# Altium PCB Arduino Shield PCB.PcbDoc
Units mil, origin at the board's own origin, x right, y up, seen from the top; angles counter-clockwise.
Board outline 2700 x 2100 mil, 4 copper layers (Component Side, Ground Plane, Power Plane, Solder Side), stack 58.234 mil thick; 21 components, 16 nets, 110 pads, 88 vias.
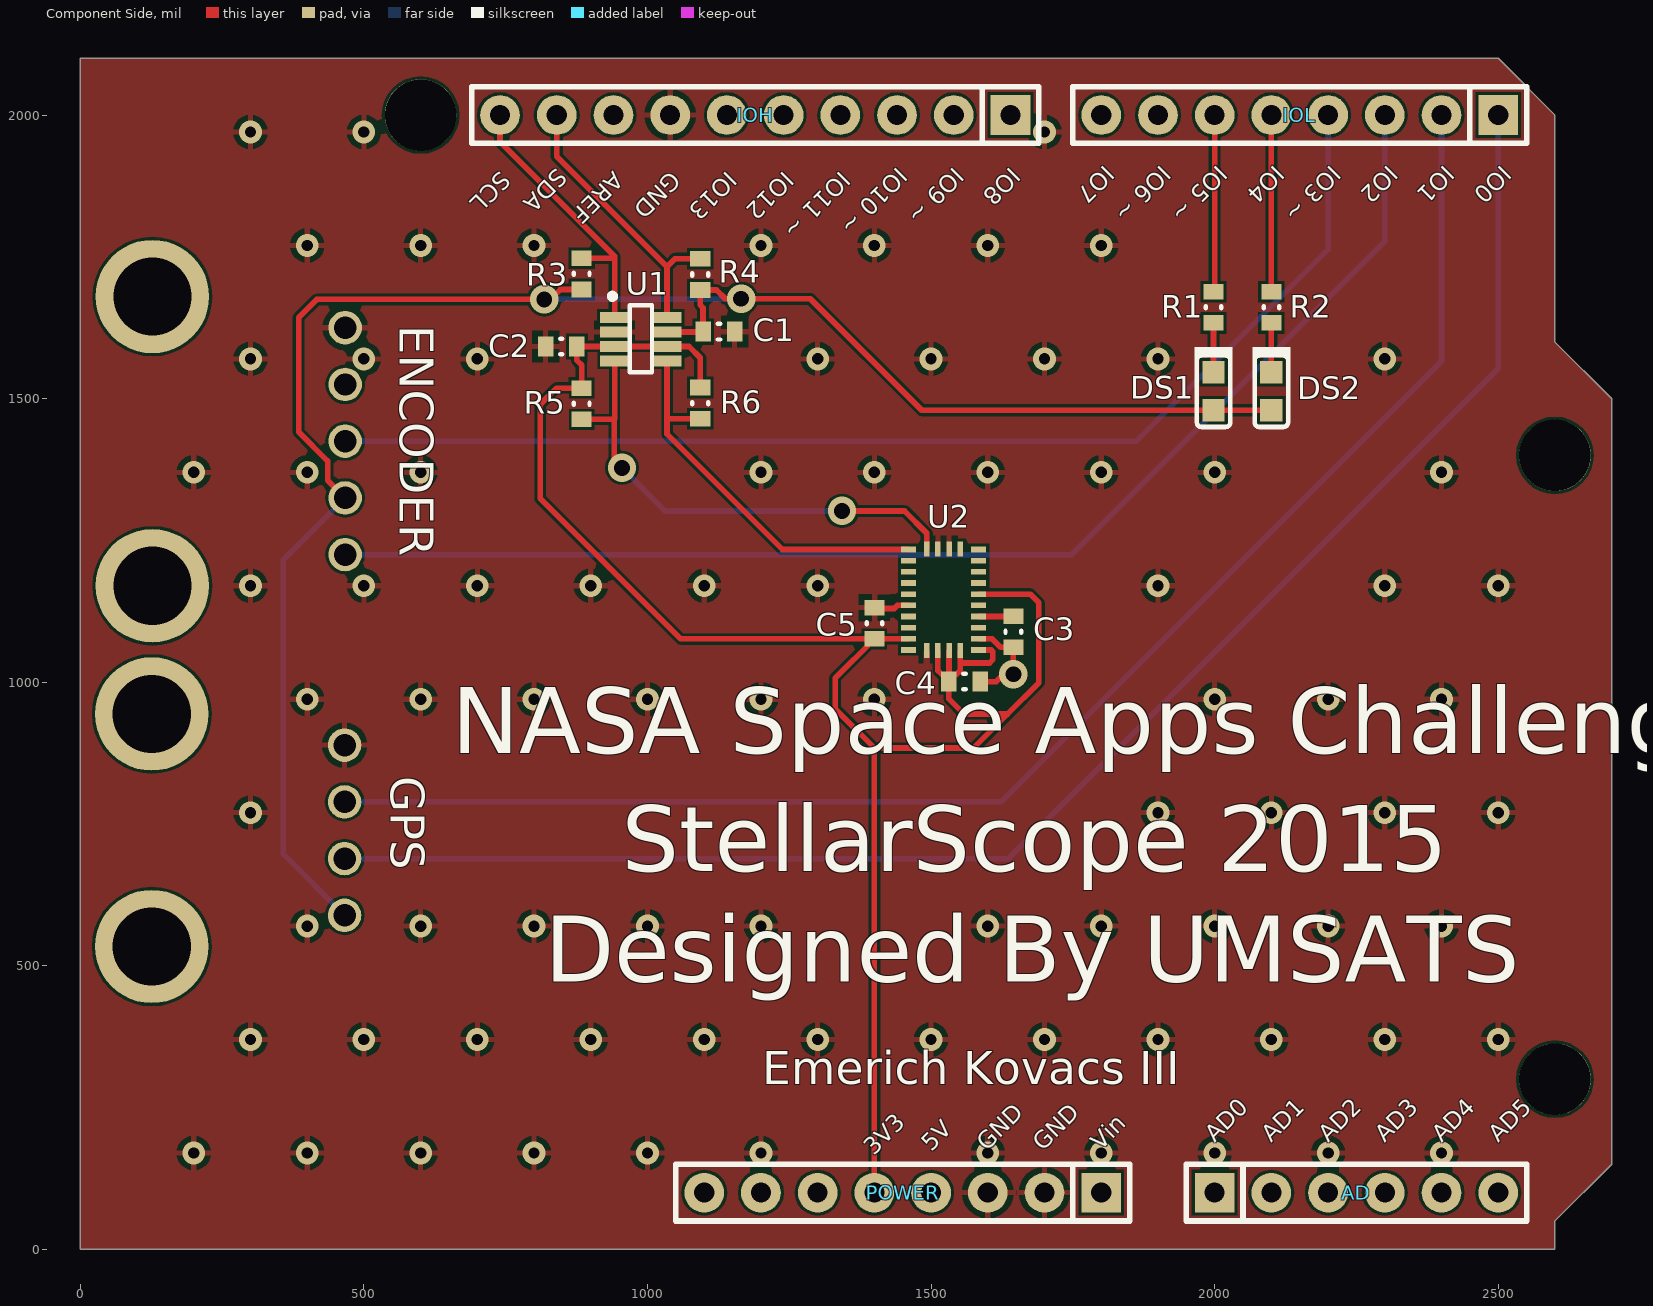
[diagram p0: Component Side view]
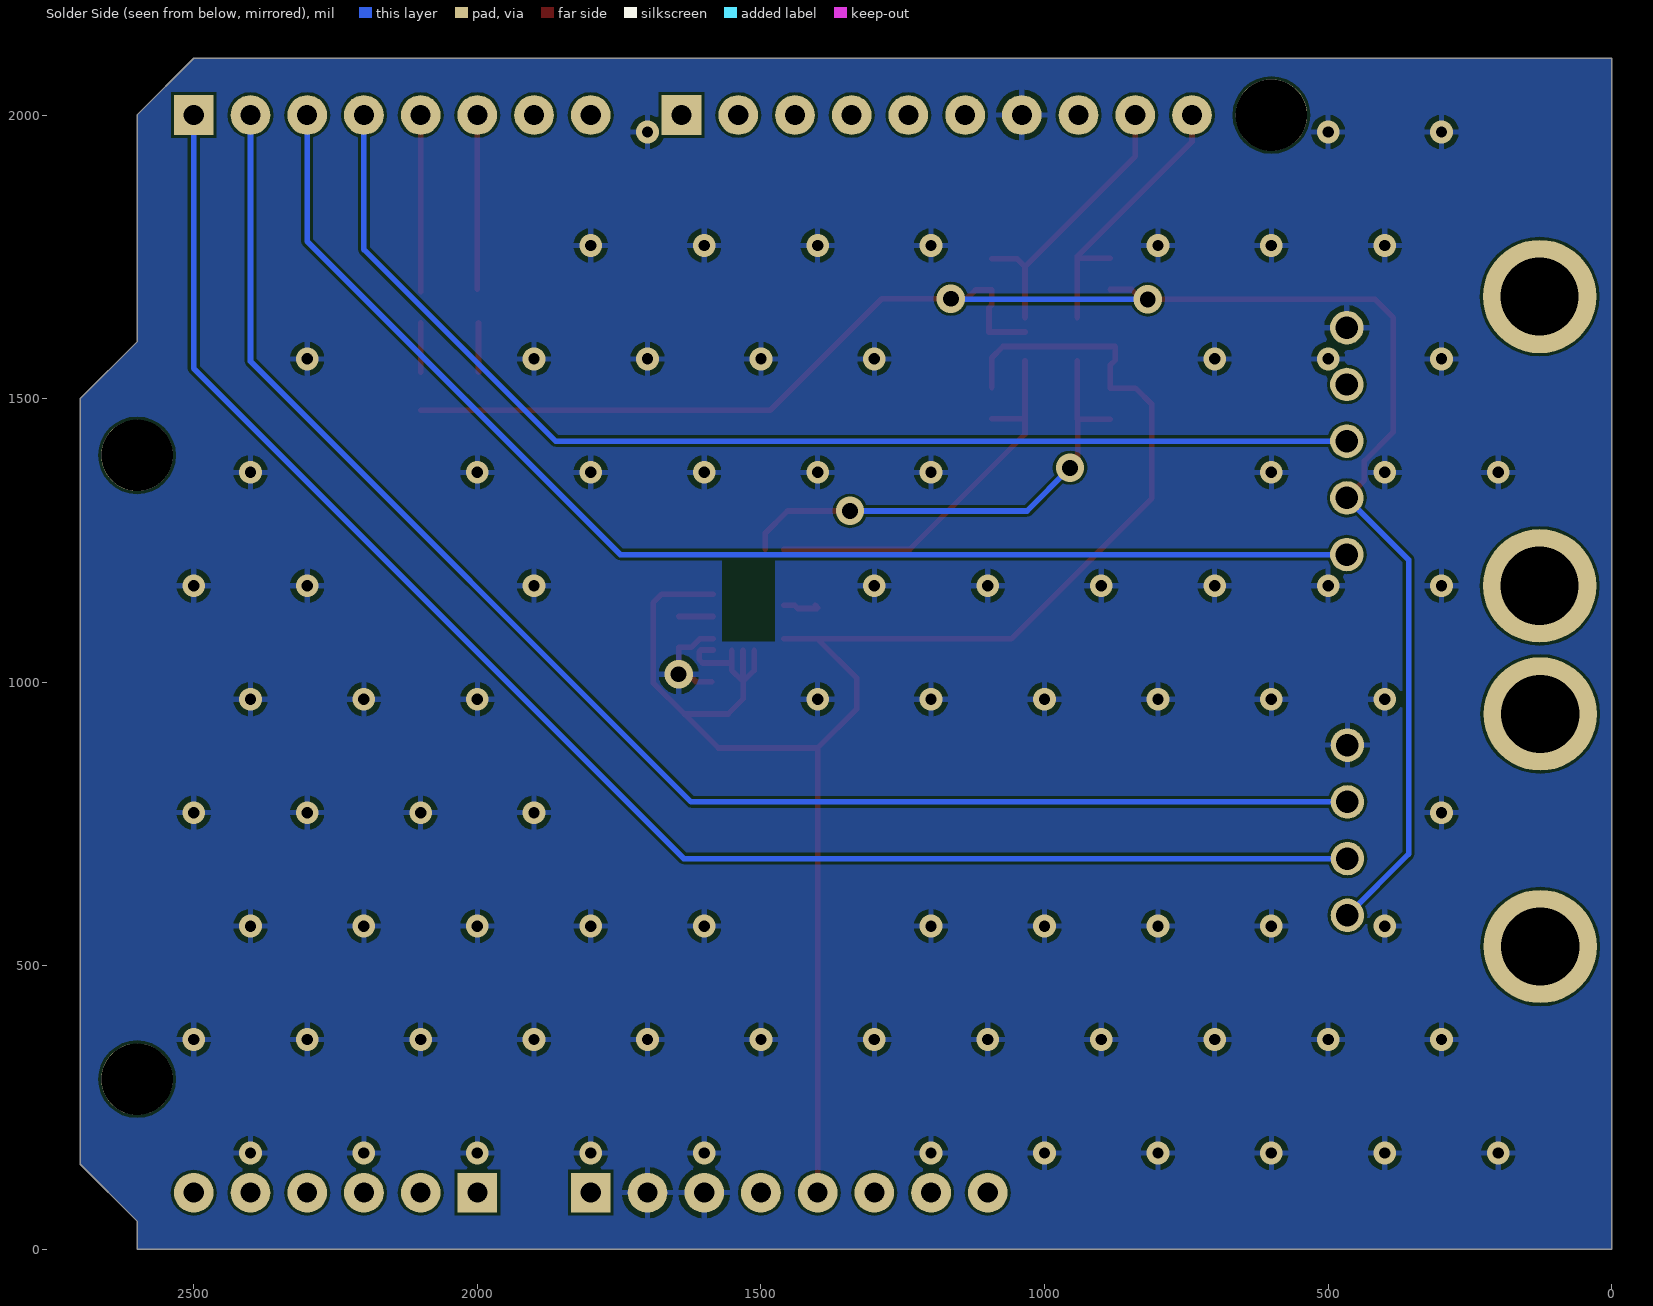
[diagram p1: Solder Side view, seen from below]
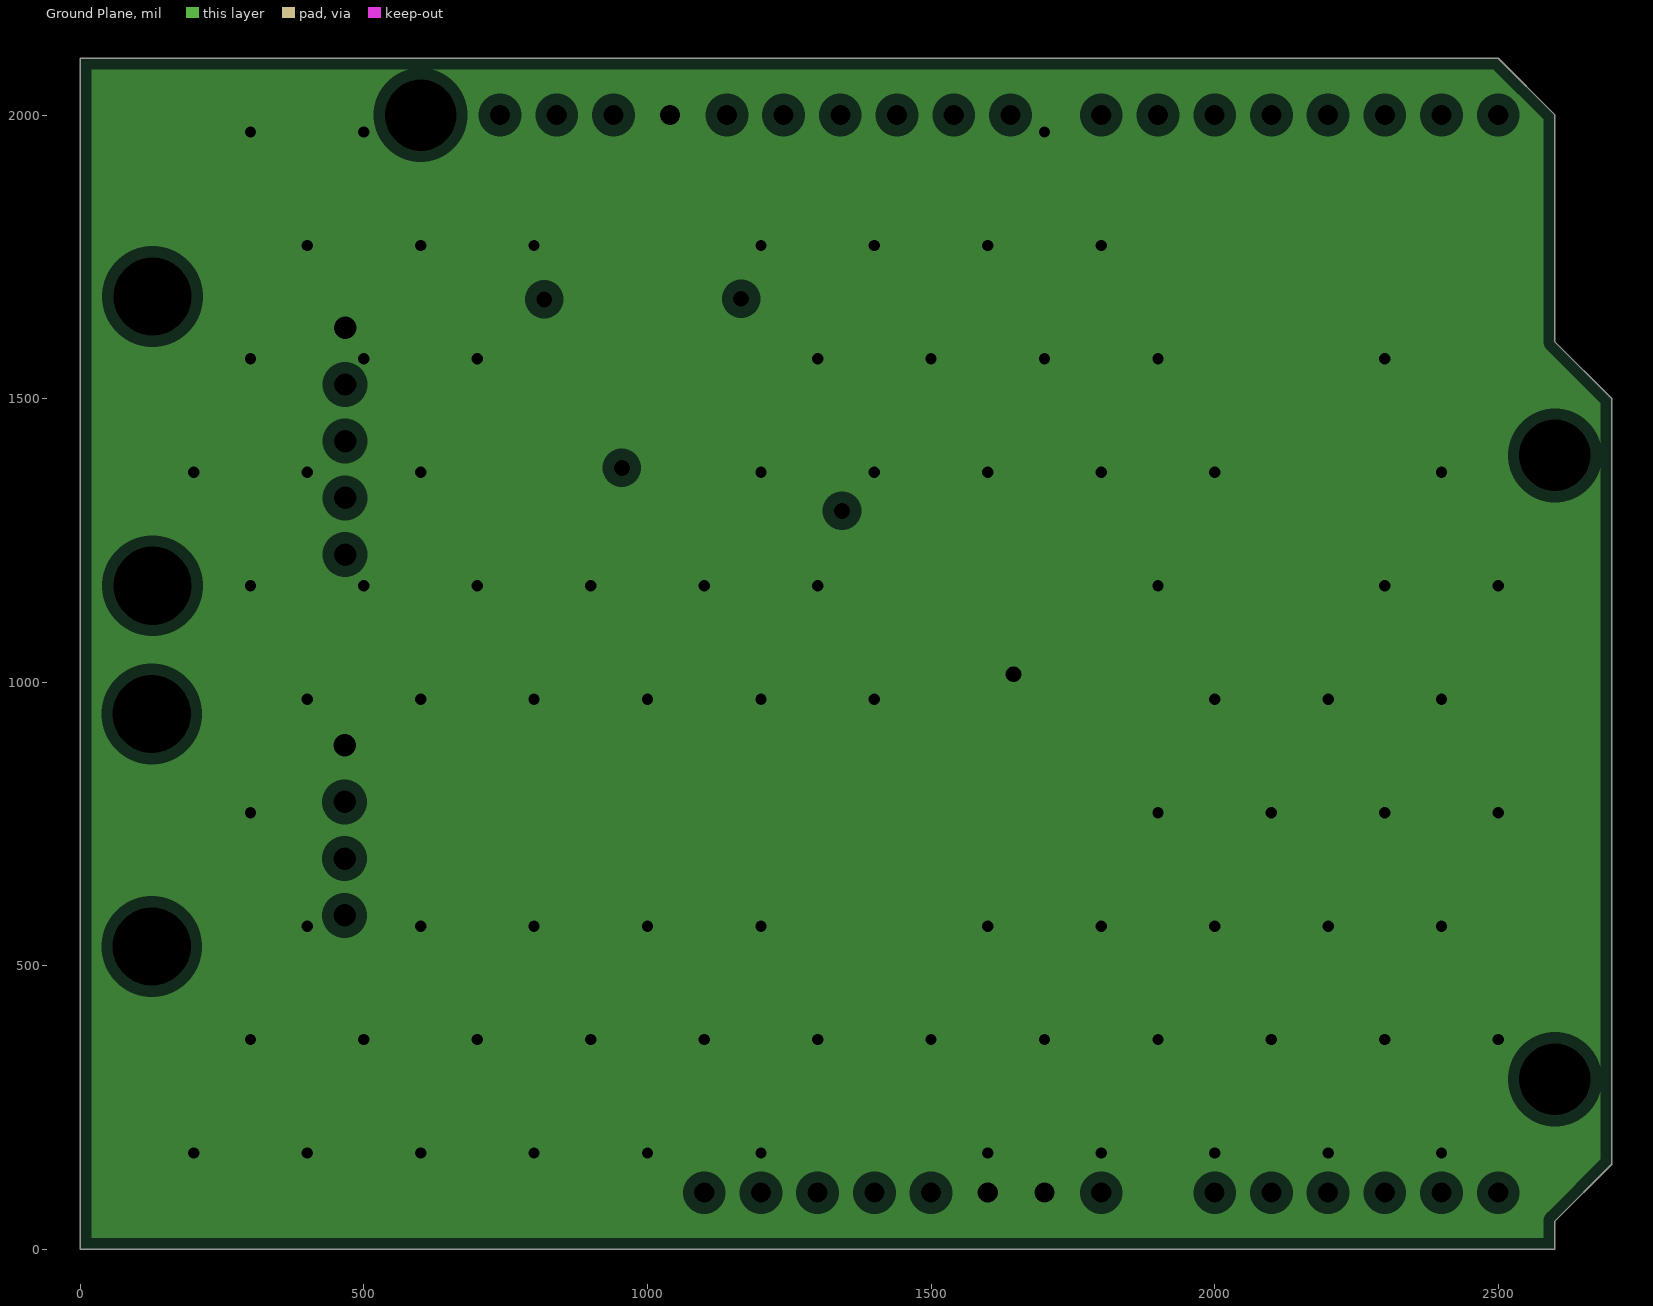
[diagram p2: Ground Plane, clearances drawn from the general rule]
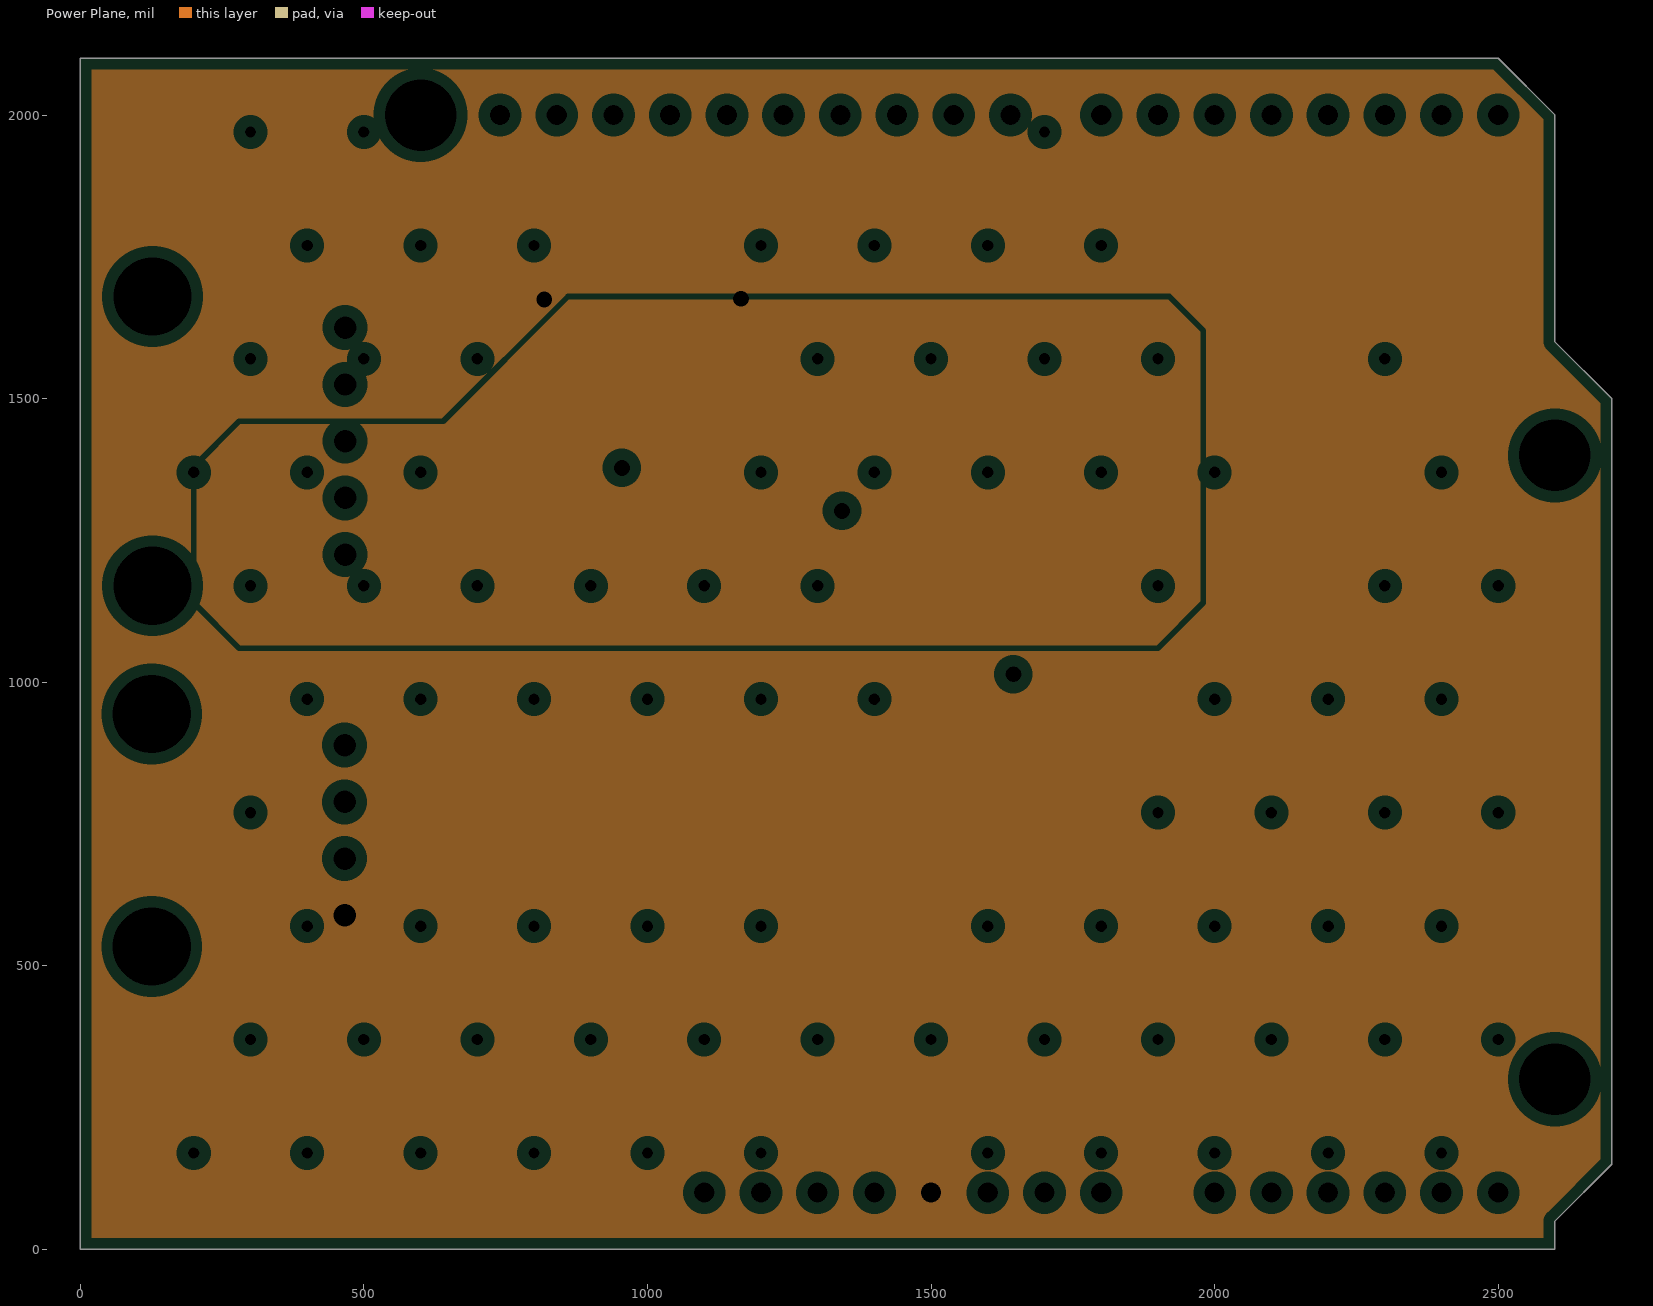
[diagram p3: Power Plane, clearances drawn from the general rule]

## Layer stack, top to bottom
Top Solder: solder mask 0.4, Solder Resist, Dk 3.5
Component Side: signal copper 1.4
Dielectric 1: core 12.6, FR-4, Dk 4.8
Ground Plane: plane copper 1.417, net GND
Dielectric 3: prepreg 30, Dk 4.2
Power Plane: plane copper 1.417, net (Multiple Nets)
Dielectric 4: core 10, Dk 4.2
Solder Side: signal copper 1.4
Bottom Solder: solder mask 0.4, Solder Resist, Dk 3.5

## Board outline
0,0 0,2100 2500,2100 2600,2000 2600,1600 2700,1500 2700,150 2600,50 2600,0

## Design rules (kind name [scope] priority, off if disabled: settings)
Clearance Clearance_2 [InNet('NetP1_1') vs InNet('GND')] p1: gap=6
Clearance Clearance_1 [InNetClass('ENC')] p2: gap=12
Clearance [All] p3: gap=5
ComponentClearance [All and not (incomponent('X1') or incomponent('U2') or incomponent('C5')) vs All and not (incomponent('X1') or incomponent('U2') or incomponent('C5'))] p1: gap=10 collisioncheckmode=3 verticalgap=10 showdistances=FALSE
HoleSize [All] p1: absolutevalues=TRUE maxlimit=100 minlimit=11.81 maxpercent=80.000 minpercent=20.000
MinimumAnnularRing [All] p1: minimumring=12
PlaneClearance [All] p1: clearance=20
PlaneConnect [All] p1: planeconnectstyle=Relief reliefexpansion=20 reliefentries=4 reliefconductorwidth=10 reliefairgap=10
PolygonConnect [All] p1: connectstyle=Relief reliefconductorwidth=10 reliefentries=4 polygonreliefangle="90 Angle" airgapwidth=10
RoutingVias [All] p1: holewidth=28 width=50 viastyle="Through Hole" minholewidth=28 minwidth=50 maxholewidth=28 maxwidth=50
SilkToSolderMaskClearance SilkscreenOverComponentPads [IsPad] p1: minsilkscreentomaskgap=10 clearancetoexposedcopper=TRUE
SolderMaskExpansion [All] p1: expansion=4
Width Width_1 [InNet('NetP1_1')] p1: maxlimit=16 minlimit=16 preferedwidth=16
Width [All] p2: maxlimit=50 minlimit=5 preferedwidth=10
25 further rules are at their usual default settings.

## Classes and differential pairs
component class "[03] - AMG": C3 C4 C5 U2
component class "[02] - CONNECTORS": AD DS1 DS2 ENCODER GPS IOH IOL POWER R1 R2
component class "[04] - LEVEL_SHIFTER": C1 C2 R3 R4 R5 R6 U1
net class "I2C Level Shifter": 3V3 5V GND NetIOH_9 NetIOH_10 NetR5_2 NetR6_2
net class "IMU Sensor": 3V3 GND NetC3_2 NetR5_2 NetR6_2 NetU3_1 NetU3_8 NetU3_10 NetU3_12 NetU3_13 NetU3_14 NetU3_15 NetU3_16 NetU3_21 NetU3_22 NetU3_23 NetU3_24 NetU3_26 NetU3_27

## Components (designator, comment, footprint, x,y, rotation, side; value= is the part's Value field where it differs from the comment)
AD "AD" "Header 6x1 8.5mm" 2000,100 r0 top locked
C1 "CAP 100nF 50V 0603(1608)" CAPC0603(1608)100_L 1126,1618 r180 top
C2 "CAP 100nF 50V 0603(1608)" CAPC0603(1608)100_L 848,1592 r0 top
C3 "CAP 100nF 50V 0603(1608)" CAPC0603(1608)100_L 1645,1089 r90 top
C4 "CAP 100nF 50V 0603(1608)" CAPC0603(1608)100_L 1559,1001 r180 top
C5 "CAP 100nF 50V 0603(1608)" CAPC0603(1608)100_L 1400,1104 r270 top
DS1 "APG1608CGKC/T" KING-LED0603-25-GREEN_V 1998,1513 r270 top
DS2 "APG1608CGKC/T" KING-LED0603-25-GREEN_V 2100,1513 r270 top
ENCODER "5-103673-4" Header_5-103673-4_TE 467,1525 r90 top
GPS "5-103672-3" PCBComponent_1 466,889 r90 top
IOH "IOH" "Header 10x1 8.5mm" 1640,2000 r180 top locked
IOL "IOL" "Header 8x1 8.5mm" 2500,2000 r180 top locked
POWER "POWER_UNO" "Header 8x1 8.5mm" 1800,100 r180 top locked
R1 "150R 5% 0603(1608)" RESC0603(1608)_L 1998,1661 r90 top
R2 "150R 5% 0603(1608)" RESC0603(1608)_L 2100,1661 r90 top
R3 "47K 5% 0603(1608)" RESC0603(1608)_L 884,1720 r90 top
R4 "47K 5% 0603(1608)" RESC0603(1608)_L 1093,1719 r90 top
R5 "47K 5% 0603(1608)" RESC0603(1608)_L 884,1491 r270 top
R6 "47K 5% 0603(1608)" RESC0603(1608)_L 1093,1492 r270 top
U1 "MAX3373E" MAX3373E 942,1643 r0 top
U2 "BNO055" BNO055 1512,1235 r180 top

## Footprints (in the part's own frame and the unit in brackets; to place one, negate y for a bottom-side part, rotate by r counter-clockwise, add the part's x,y. Pads: shape width x height; smd on the part's side, far side on the other; paste and mask are expansions set on the pad)
BNO055 [mm] "LGA, 4-Leads, Body 5.20x3.80mmx18.00mm, Pitch 0.50mm"
  rect 0.675x0.25 smd: 1(1.325,4.525) 6(-1.825,4.525) 7(-1.825,4.025) 8(-1.825,3.525) 9(-1.825,3.025) 10(-1.825,2.525) 11(-1.825,2.025) 12(-1.825,1.525) 13(-1.825,1.025) 14(-1.825,0.525) 15(-1.825,0.025) 20(1.325,0.025) 21(1.325,0.525) 22(1.325,1.025) 23(1.325,1.525) 24(1.325,2.025) 25(1.325,2.525) 26(1.325,3.025) 27(1.325,3.525) 28(1.325,4.025)
  rect 0.25x0.675 smd: 2(0.5,4.55) 3(0,4.55) 4(-0.5,4.55) 5(-1,4.55) 16(-1,0) 17(-0.5,0) 18(0,0) 19(0.5,0)
  body extent -2.03,-0.28 1.53,4.84, height 1.8
CAPC0603(1608)100_L [mm] "Chip Capacitor, Body 1.6x0.8mm, Height 1.0mm, IPC High Density"
  rect 0.7x0.9 smd: 1(-0.7,0) 2(0.7,0)
  silkscreen extent -0.05,-0.35 0.05,0.35, body extent -0.87,-0.47 0.88,0.48, height 1
"Header 6x1 8.5mm" [mil] "Stackable 6 pin header"
  rect 70x70 hole 35.43: 1(0,0)
  round 70 hole 35.43: 2(100,0) 3(200,0) 4(300,0) 5(400,0) 6(500,0)
  silkscreen extent -50,-50 550,50, body extent -50,-50 550,50, height 335
"Header 8x1 8.5mm" [mil] "Stackable 8 pin header"
  rect 70x70 hole 35.43: 1(0,0)
  round 70 hole 35.43: 2(100,0) 3(200,0) 4(300,0) 5(400,0) 6(500,0) 7(600,0) 8(700,0)
  silkscreen extent -50,-50 750,50, body extent -50,-50 750,50, height 335
"Header 10x1 8.5mm" [mil] "Stackable 10 pin header"
  rect 70x70 hole 35.43: 1(0,0)
  round 70 hole 35.43: 2(100,0) 3(200,0) 4(300,0) 5(400,0) 6(500,0) 7(600,0) 8(700,0) 9(800,0) 10(900,0)
  silkscreen extent -50,-50 950,50, body extent -50,-50 950,50, height 335
Header_5-103673-4_TE [mm]
  round 1.5 hole 1 mask+0.07: 1(-7.62,0) 2(-5.08,0) 3(-2.54,0) 4(0,0) 5(2.54,0)
  round 5.08 hole 3.5 mask+0.07: ""(-9.017,8.636) ""(3.937,8.636)
  body extent -10.16,-1.06 5.08,12.52, height 6.62
KING-LED0603-25-GREEN_V [mm] "LED, SMT, Body 1.6 x 0.8 mm, 0.25mm Thickness"
  rect 1x1 smd paste+0 mask+0: 1(0.85,0) 2(-0.85,0)
  silkscreen extent -1.97,-0.85 1.6,0.85, body extent -0.8,-0.4 0.8,0.4, height 0.25
MAX3373E [mm] "SOT23, 6-Leads, Body 2.90x2.80mm, Pitch 0.65mm, IPC Medium Density"
  rect 1.3x0.5 smd: 1(0,0) 2(0,-0.65) 3(0,-1.3) 4(0,-1.95) 5(2.35,-1.95) 6(2.35,-1.3) 7(2.35,-0.65) 8(2.35,0)
  silkscreen extent -0.22,-2.45 1.68,1.07, body extent 0.3,-2.45 2.05,0.55, height 1.45
PCBComponent_1 [mm]
  round 1.5 hole 1 mask+0.07: 1(-7.62,0) 2(-5.08,0) 3(-2.54,0) 4(0,0)
  round 5.08 hole 3.5 mask+0.07: ""(-9.017,8.636) ""(1.397,8.636)
  body extent -10.16,-1.14 2.54,12.45, height 6.6
RESC0603(1608)_L [mm] "Chip Resistor, Body 1.6x0.8mm, IPC High Density"
  rect 0.7x0.9 smd: 1(-0.7,0) 2(0.7,0)
  silkscreen extent -0.05,-0.35 0.05,0.35, body extent -0.85,-0.47 0.85,0.47, height 0.6

## Part data
C1 C2 C3 C4 C5: library part CMP-1035-02592-1, "CAP 100nF 50V ±10% 0603 (1608 Metric) Thickness 1mm SMD"
DS1 DS2: library part CMP-0239-00001-1, "LED, SMT, 0603(1608), 0.25mm Thickness, Green"
ENCODER: library part Header_5-103673-4_TE
GPS: library part Header_5-103672-3_TE
R1 R2: library part CMP-1012-00054-1, "150R 0.1W 5% 0603 (1608 Metric)  SMD"
R3 R4 R5 R6: library part CMP-1012-00114-1, "47K 0.1W 5% 0603 (1608 Metric)  SMD"

## Free pads (board coordinates)
  round 125.98 hole 125.98: 0(600,2000) 0(2600,300) 0(2600,1400)

## Via types
v1: diameter 40, hole 20, Component Side to Solder Side, 83 vias
v2: diameter 50, hole 28, Component Side to Solder Side, 5 vias

## Nets (pads, with @x,y where several pads share a name; then routed paths per layer and width w, separated by ;. In a path a pad name is that pad's centre, name@x,y a point inside that pad or via, vN(x,y) a via of type N, cw(c..) or ccw(c..) an arc to the next point about the centre after c; other vN are vias at no path point)
3V3: C2.2 C4.2 C5.2 POWER.5 R5.1 R6.1 U1.3 U1.6 U2.3 U2.4 U2.5 U2.6 U2.11 U2.28 | length 3408.2
  Component Side w10: R6.1 1093,1572 1073.18,1591.82 U1.6 U1.3 941.82,1592 C2.2 875.56,1567.44 884,1559 R5.1 839.56,1518.56 811,1490 811,1324 1058.56,1076.44 C5.2 ; POWER.5 1400,884 ; U2.28 1400.09,1076.54 C5.2 ; U2.3 1512,1020.44 C4.2 ; U2.4 C4.2@1531.68,1001.24 ; U2.5 1551.37,1034 ; U2.6 1606.15,1056.85 1609,1054 1609,1040 1603,1034 1551.37,1034 ; U2.11 1674.72,1155.28 1690,1140 1690,999 1635,944 ; 1400,884 1331,953 1331,1007.44 C5.2 ; 1400,884 1575,884 1635,944 ; C4.2 1531.44,970.56 1558,944 1635,944 ; C4.2 C4.2@1531.68,1001.24 ; C4.2@1531.68,1001.24 1551.37,1020.93 1551.37,1034
5V: C1.2 DS1.1 DS2.1 ENCODER.2 GPS.1 POWER.4 R3.1 R4.1 U1.7 | length 3279.4
  Component Side w10: ENCODER.2 436,1356 436,1390 385,1441 385,1643 417,1675 v2(818,1675) 829,1675 846.44,1692.44 R3.1 ; U1.7 1097.85,1617.41 C1.2 1098,1618.44 1098,1660 1093,1665 R4.1 1121.56,1691.44 1137,1676 v2(1165,1676) 1287,1676 1483.46,1479.54 DS1.1 DS2.1
  Solder Side w10: GPS.1 358,697 358,1216 ENCODER.2 ; v2(818,1675) 1164,1675 v2(1165,1676)
GND: C1.1 C2.1 C3.1 C4.1 C5.1 ENCODER.5 GPS.4 IOH.7 POWER.2 POWER.3 U1.2 U2.2 U2.7 U2.17 U2.18 U2.25 | length 247.2
  Component Side w10: C5.1@1404.03,1135.59 C5.1 1401.56,1130 1435,1130 1440.59,1135.59 U2.25 ; U2.7 1607.68,1076.54 1622.77,1061.44 C3.1 v2(1645,1014) 1628,1014 1615,1001 C4.1
  other v1: 200,170 400,170 600,170 800,170 1000,170 1200,170 1600,170 1800,170 2000,170 2200,170 2400,170 300,370 500,370 700,370 900,370 1100,370 1300,370 1500,370 1700,370 1900,370 2100,370 2300,370 2500,370 400,570 600,570 800,570 1000,570 1200,570 1600,570 1800,570 2000,570 2200,570 2400,570 300,770 1900,770 2100,770 2300,770 2500,770 400,970 600,970 800,970 1000,970 1200,970 1400,970 2000,970 2200,970 2400,970 300,1170 500,1170 700,1170 900,1170 1100,1170 1300,1170 1900,1170 2300,1170 2500,1170 200,1370 400,1370 600,1370 1200,1370 1400,1370 1600,1370 1800,1370 2000,1370 2400,1370 300,1570 500,1570 700,1570 1300,1570 1500,1570 1700,1570 1900,1570 2300,1570 400,1770 600,1770 800,1770 1200,1770 1400,1770 1600,1770 1800,1770 300,1970 500,1970 1700,1970
NetC3_2: C3.2 U2.9 | length 61.4
  Component Side w10: U2.9 1644.35,1115.91 C3.2
NetDS1_2: DS1.2 R1.1 | length 87
  Component Side w10: DS1.2 R1.1
NetDS2_2: DS2.2 R2.1 | length 87
  Component Side w10: DS2.2 R2.1
NetENCODER_1: ENCODER.1 IOL.3 | length 2284.6
  Solder Side w10: ENCODER.1 1748,1225 2300,1777 IOL.3
NetENCODER_3: ENCODER.3 IOL.4 | length 2110
  Solder Side w10: ENCODER.3 1862,1425 2200,1763 IOL.4
NetGPS_2: GPS.2 IOL.1 | length 2838.9
  Solder Side w10: GPS.2 1636,689 2500,1553 IOL.1
NetGPS_3: GPS.3 IOL.2 | length 2689.8
  Solder Side w10: GPS.3 1623,789 2400,1566 IOL.2
NetIOH_9: IOH.9 R4.2 U1.8 | length 501.9
  Component Side w10: IOH.9 840,1927 1034.52,1732.48 ; U1.8 1034.52,1732.48 ; R4.2 1048.6,1746.56 1034.52,1732.48
NetIOH_10: IOH.10 R3.2 U1.1 | length 500.1
  Component Side w10: IOH.10 740,1953 942,1751 ; R3.2 938.56,1747.56 942,1751 ; U1.1 942,1751
NetIOL_5: IOL.5 R2.2 | length 311.4
  Component Side w10: R2.2 IOL.5
NetIOL_6: IOL.6 R1.2 | length 307.4
  Component Side w10: R1.2@2000,1692.56 IOL.6
NetR5_2: R5.2 U1.4 U2.19 | length 864.3
  Component Side w10: R5.2 941.44,1463.44 ; U1.4 942,1464 941.44,1463.44 ; v2(955,1378) 941.44,1391.56 941.44,1463.44 ; v2(1343,1302) 1453,1302 1492.32,1262.68 U2.19
  Solder Side w10: v2(955,1378) 1031,1302 v2(1343,1302)
NetR6_2: R6.2 U1.5 U2.20 | length 696.4
  Component Side w10: U1.5 1034.52,1437.48 1237.98,1234.02 U2.20 ; 1034.96,1464.44 R6.2
pads on no net: AD.1 AD.2 AD.3 AD.4 AD.5 AD.6 ENCODER. ENCODER.4 GPS. IOH.1 IOH.2 IOH.3 IOH.4 IOH.5 IOH.6 IOH.8 IOL.7 IOL.8 POWER.1 POWER.6 POWER.7 POWER.8 U2.1 U2.8 U2.10 U2.12 U2.13 U2.14 U2.15 U2.16 U2.21 U2.22 U2.23 U2.24 U2.26 U2.27

## Polygon pours and split planes (outlines as drawn)
GND on Component Side "Component Side-No Net" (solid, remove dead copper, pour order 5): 0,0 0,2100 2500,2100 2600,2000 2600,1600 2700,1500 2700,150 2600,50 2600,0
GND on Solder Side "Component Side-No Net1" (solid, pour order 7): 0,0 0,2100 2500,2100 2600,2000 2600,1600 2700,1500 2700,150 2600,50 2600,0
GND on Ground Plane (split plane): 2579.9,1991.68 2579.9,1600 2580.29,1596.08 2581.43,1592.31 2583.29,1588.83 2585.79,1585.79 2679.9,1491.68 2679.9,158.32 2585.79,64.21 2583.29,61.17 2581.43,57.69 2580.29,53.92 2579.9,50 2579.9,20.1 20.1,20.1 20.1,2079.9 2491.68,2079.9
3V3 on Power Plane (split plane): 1974.9,1617.89 1974.9,1142.11 1897.89,1065.1 282.11,1065.1 205.1,1142.11 205.1,1377.89 282.11,1454.9 640,1454.9 641.95,1455.29 643.6,1456.4 862.11,1674.9 1917.89,1674.9
5V on Power Plane (split plane): 2579.9,1991.68 2579.9,1600 2580.29,1596.08 2581.43,1592.31 2583.29,1588.83 2585.79,1585.79 2679.9,1491.68 2679.9,158.32 2585.79,64.21 2583.29,61.17 2581.43,57.69 2580.29,53.92 2579.9,50 2579.9,20.1 20.1,20.1 20.1,2079.9 2491.68,2079.9

## Other copper
Component Side:
  pour cut-out: 1476,1072 1568,1072 1568,1219 1476,1219
Solder Side:
  pour cut-out: 1476,1072 1568,1072 1568,1219 1476,1219
Power Plane (plane layer: these items are gaps in the copper):
  lines w10: 200,1140 200,1380 280,1460 640,1460 860,1680 1920,1680 1980,1620 1980,1140 1900,1060 280,1060 200,1140

## Silkscreen, mask and mechanical layers (free items; w line width, h text height)
Top Overlay:
  text "IO7" at 1805,1912.93 h30 r225
  text "IO6 ~" at 1905,1912.93 h30 r225
  text "IO5 ~" at 2005,1912.93 h30 r225
  text "IO4" at 2105,1912.93 h30 r225
  text "IO3 ~" at 2205,1912.93 h30 r225
  text "IO2" at 2305,1912.93 h30 r225
  text "IO1" at 2405,1912.93 h30 r225
  text "IO0" at 2505,1912.93 h30 r225
  text "IO10 ~" at 1440,1910 h30 r225
  text "IO9 ~" at 1540,1910 h30 r225
  text "IO8" at 1640,1910 h30 r225
  text "SDA" at 840,1907.93 h30 r225
  text "SCL" at 740,1902.93 h30 r225
  text "AREF" at 940,1902.93 h30 r225
  text "GND" at 1040,1902.93 h30 r225
  text "IO13" at 1140,1902.93 h30 r225
  text "IO12" at 1240,1902.93 h30 r225
  text "IO11 ~" at 1340,1902.93 h30 r225
  text "NASA Space Apps Challenge" at 655,836 h200
  text "StellarScope 2015" at 955,628 h200
  text "Designed By UMSATS" at 819,433 h200
  text "Emerich Kovacs III" at 1202,272 h100
  text "AD0" at 2000,187.07 h30 r45
  text "AD1" at 2100,187.07 h30 r45
  text "AD2" at 2200,187.07 h30 r45
  text "AD3" at 2300,187.07 h30 r45
  text "AD4" at 2400,187.07 h30 r45
  text "AD5" at 2500,187.07 h30 r45
  text "Vin" at 1799,173 h30 r45
  text "GND" at 1598,172 h30 r45
  text "GND" at 1697,172 h30 r45
  text "5V" at 1500,171 h30 r45
  text "3V3" at 1399,164 h30 r45
  text "RESET" at 1295,-2515 h30 r45
  text "3v3" at 1395,-2515 h30 r45
  text "5v" at 1495,-2515 h30 r45
  text "GND" at 1595,-2515 h30 r45
  text "GND" at 1695,-2515 h30 r45
  text "Vin" at 1795,-2515 h30 r45
Mechanical 1:
  circle w5: c600,2000 r62.99
  circle w5: c2600,300 r62.99
  circle w5: c2600,1400 r62.99
  lines w5: 2600,1600 2600,2000 2500,2100 0,2100 0,0 2600,0 2600,50 2700,150 2700,1500
  lines w47.24: 0,0 0,2100 2500,2100 2600,2000 2600,1600 2700,1500 2700,150 2600,50 2600,0 0,0